# Altium PCB PCB_AVlabs AV-GMK MK I_2_2024-01-18 (1).pcbdoc (part 4 of 5)
Units mil, origin at the board's own origin, x right, y up, seen from the top; angles counter-clockwise.
Board outline 17777.1 x 9140.8 mil, 2 copper layers (Top Layer, Bottom Layer); 156 components, 279 nets, 1257 pads, 596 vias.
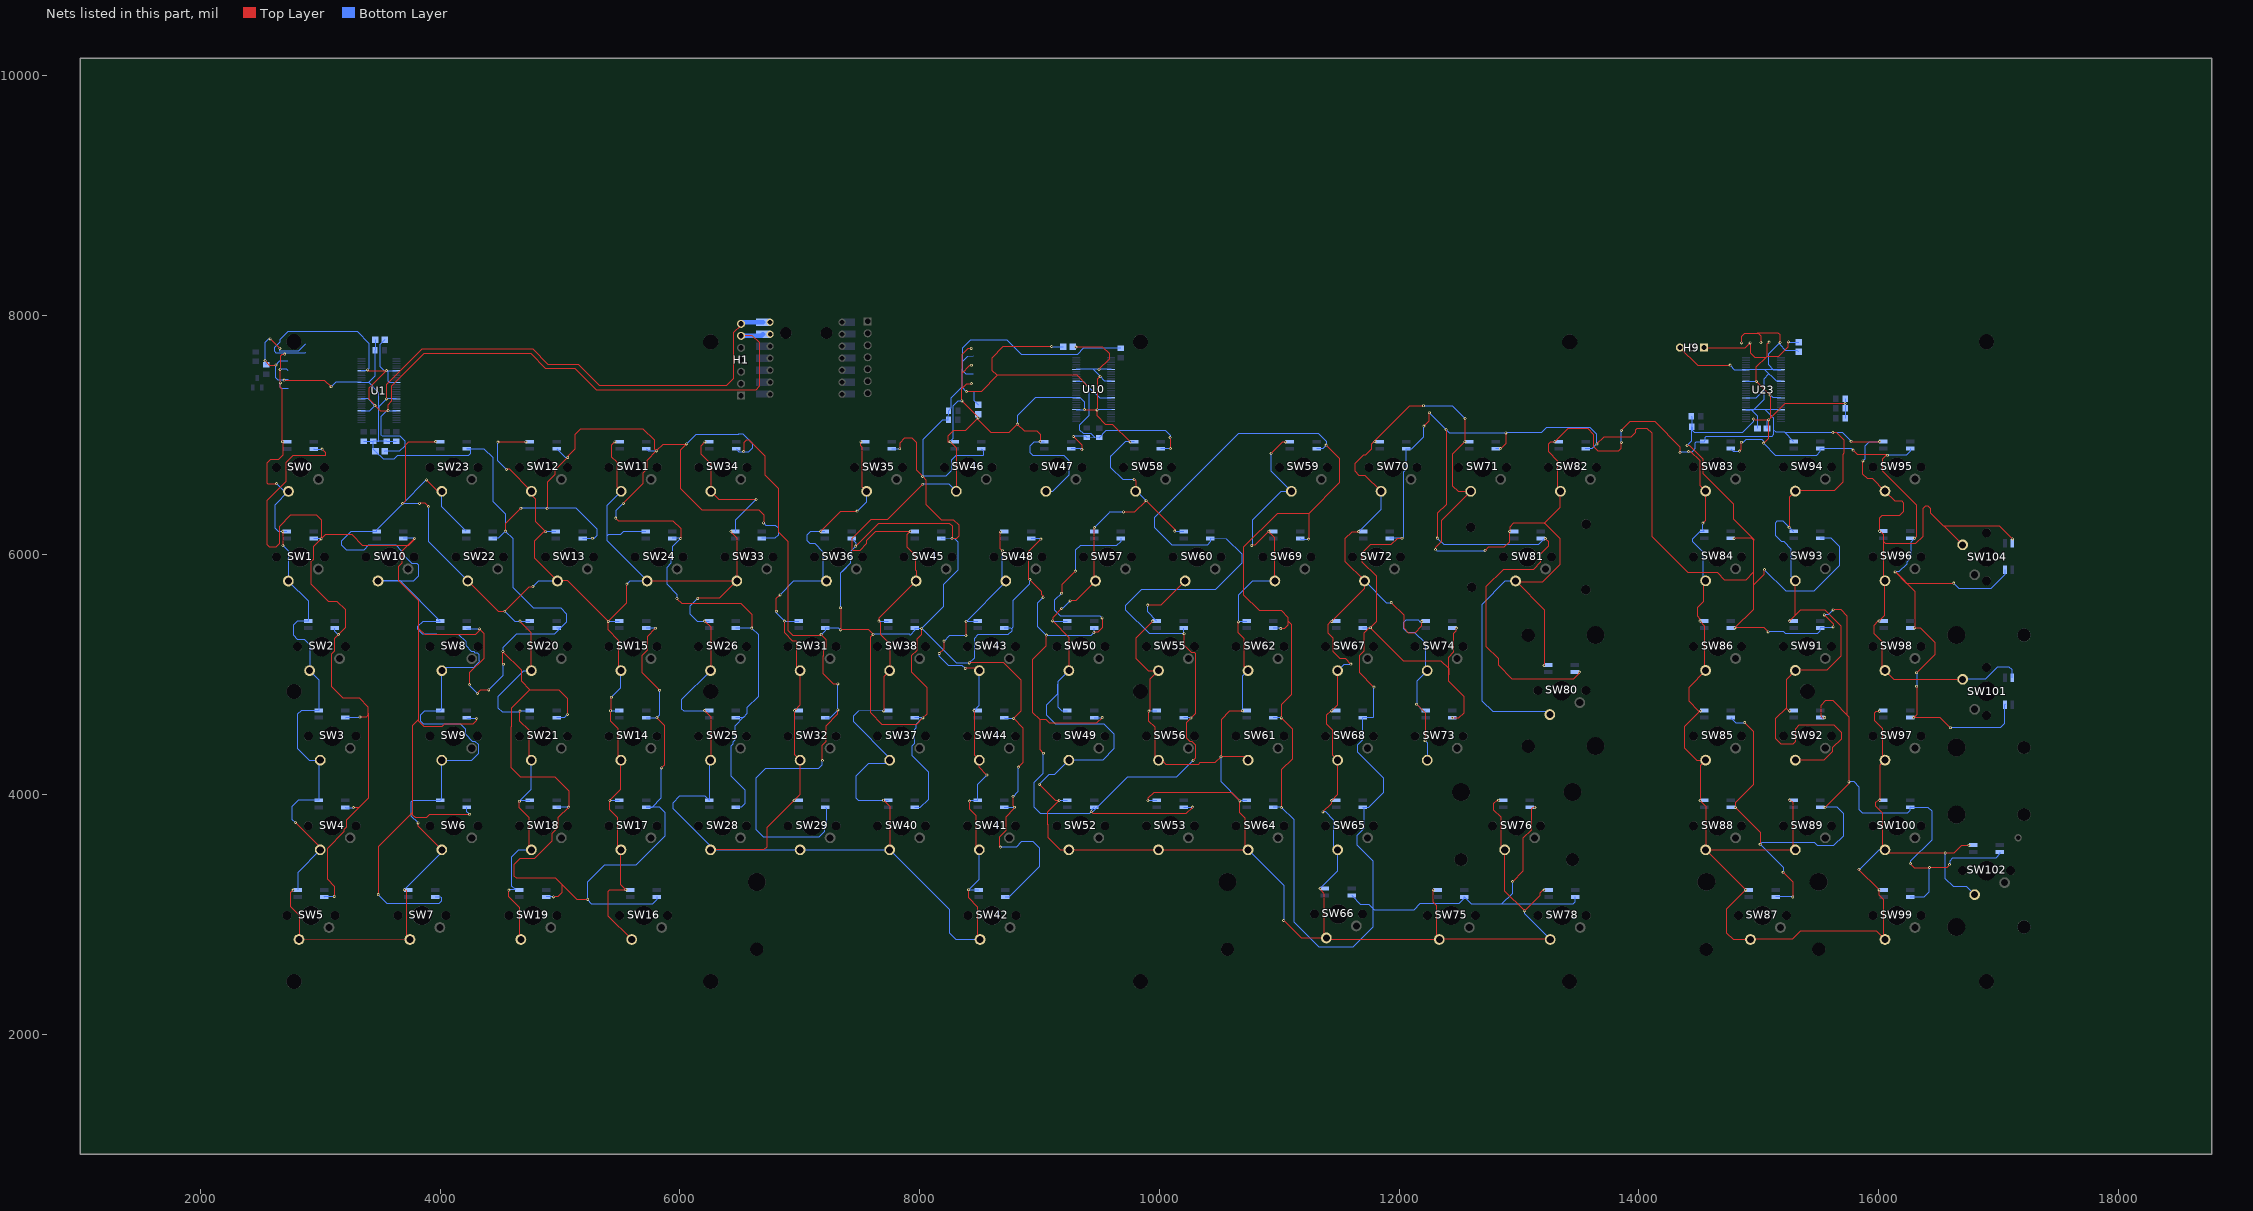
[diagram p4: the nets of this part, all layers, seen from the top]

## Via types
v1: diameter 24.41, hole 12.2, Top Layer to Bottom Layer, tented both sides, 596 vias

## Nets (pads, with @x,y where several pads share a name; then routed paths per layer and width w, separated by ;. In a path a pad name is that pad's centre, name@x,y a point inside that pad or via, vN(x,y) a via of type N, cw(c..) or ccw(c..) an arc to the next point about the centre after c; other vN are vias at no path point) (continued)
VDD_PCA: C1.1 C2.1 C3.1 C4.1 C5.1 C6.1 H1.7 H9.1 pad.14 R1.1 R2.1 R3.1 R4.1 R5.1 R6.1 R7.1 R8.1 R9.1 R10.1 R11.1 R12.1 R13.1 R14.1 R15.1 R16.2 SW0.VCC SW1.VCC SW2.VCC SW3.VCC SW4.VCC SW5.VCC SW6.VCC SW7.VCC SW8.VCC SW9.VCC SW10.VCC SW11.VCC SW12.VCC SW13.VCC SW14.VCC SW15.VCC SW16.VCC SW17.VCC SW18.VCC SW19.VCC SW20.VCC SW21.VCC SW22.VCC SW23.VCC SW24.VCC SW25.VCC SW26.VCC SW28.VCC SW29.VCC SW31.VCC SW32.VCC SW33.VCC SW34.VCC SW35.VCC SW36.VCC SW37.VCC SW38.VCC SW40.VCC SW41.VCC SW42.VCC SW43.VCC SW44.VCC SW45.VCC SW46.VCC SW47.VCC SW48.VCC SW49.VCC SW50.VCC SW52.VCC SW53.VCC SW55.VCC SW56.VCC SW57.VCC SW58.VCC SW59.VCC SW60.VCC SW61.VCC SW62.VCC SW64.VCC SW65.VCC SW66.VCC SW67.VCC SW68.VCC SW69.VCC SW70.VCC SW71.VCC SW72.VCC SW73.VCC SW74.VCC SW75.VCC SW76.VCC SW78.VCC SW80.VCC SW81.VCC SW82.VCC SW83.VCC SW84.VCC SW85.VCC SW86.VCC SW87.VCC SW88.VCC SW89.VCC SW91.VCC SW92.VCC SW93.VCC SW94.VCC SW95.VCC SW96.VCC SW97.VCC SW98.VCC SW99.VCC SW100.VCC SW101.VCC SW102.VCC SW104.VCC U1.18 U1.46 U10.18 U10.46 U23.18 U23.46 | length 131772.6
  Top Layer w10: v1(2540.7,7619.7) 2577.3,7583.1 v1(2630.9,7583.1) ; v1(2582.3,7800.6) 2661.2,7721.7 v1(2664.1,7721.7) ; v1(2699.5,7457.6) 3036.1,7457.6 v1(3092.1,7401.6) ; v1(3016.2,6880.9) 3042.6,6854.5 3042.6,6825.2 2770.4,6825.2 2711.9,6766.7 2711.9,6610.2 2554,6452.3 2554,6088.1 2574.7,6067.4 2632.6,6067.4 2661.9,6096.7 2661.9,6240.2 2754.8,6333.1 2966.2,6333.1 3007.6,6291.7 v1(3007.6,6133.1) ; v1(3117.5,3151) 3117.5,3237 3057.5,3297 3057.5,3550 3196.5,3689 3196.5,3708 3217.5,3729 3217.5,3785 3323.5,3891 ; v1@3151.5,5333 v1(3151.5,5334) ; v1(3277.5,3891) 3323.5,3891 ; v1(3331.5,4647) 3382.5,4647 3398.5,4663 3398.5,4734 3325.5,4807 3189.5,4807 3094.5,4902 3094.5,5172 3116.5,5194 3116.5,5299 v1(3151.5,5334) ; 3398.5,4683 3402.5,4679 3402.5,3970 3323.5,3891 ; v1(3484.9,3165.1) 3484.9,3563.89 3770.1,3849.09 ; v1(3555,7300) 3555,7421.1 3851.1,7717.2 4772.5,7717.2 4900.2,7589.5 5154,7589.5 5328.1,7415.4 6392.9,7415.4 6450.3,7472.8 6450.3,7856.1 6510.8,7916.6 H1.7@6510.8,7926.8 ; 3819,4622.7 3770.1,4573.8 3770.1,3833.4 3794.1,3809.4 3888.8,3809.4 3915.4,3836 v1(4247.4,3836) ; 3819,5394.6 3819,4614.8 3864.9,4568.9 4019.7,4568.9 4039.7,4588.9 4276,4588.9 4305.9,4618.8 v1(4305.9,4636.3) ; v1(4245.5,4916.4) 4245.5,5014.5 4365.9,5134.9 4365.9,5345.4 v1(4328.9,5382.4) 4328.9,5365.8 4299.7,5336.6 3871.7,5336.6 3819,5389.3 3819,5621.3 3651,5789.3 3651,5898.7 3681.6,5929.3 3681.6,6031.1 v1(3787.7,6137.2) 3787.7,6130.1 3739.1,6081.5 3353.3,6081.5 3264.1,6170.7 3045.2,6170.7 v1(3007.6,6133.1) ; v1(4311.9,4843.6) 4341,4872.7 v1(4406.6,4872.7) ; v1(4528.3,5087.2) 4523.7,5091.8 v1(4523.7,5193.4) 4676.7,5040.4 4676.7,4947.4 4749.7,4874.4 ; v1(4545.3,6197.7) 4545.3,6259.2 v1(4674.6,6388.5) ; v1(4893.6,6385.9) 4893.6,6603.3 4958.7,6668.4 4958.7,6705.7 v1(5065.4,6812.4) 5065.4,6822.4 5122,6879 5122,7001.9 5169.1,7049 5695,7049 5790.4,6953.6 5790.4,6881.4 v1(5805.2,6866.6) ; v1(4947.7,3147.4) 4981.7,3147.4 5013.7,3179.4 5013.7,3252.4 4959.7,3306.4 ; v1(5062.7,4669.4) 5062.7,4801.4 4989.7,4874.4 4749.7,4874.4 ; v1(5232.2,3125.1) 5141,3125.1 4959.7,3306.4 ; v1(5465.8,6306.6) 5487.3,6285.1 5942.7,6285.1 6006.7,6221.1 v1(6006.7,6136.1) ; v1(5528.7,6428.8) 5691.7,6591.8 5691.7,6639.9 5691.7,6680.7 5723.2,6712.2 5723.2,6784.6 v1(5805.2,6866.6) ; v1(5796.1,5387.6) 5730.8,5322.3 5730.8,5206.2 5685.5,5160.9 5685.5,5016.9 v1(5832.1,4870.3) ; v1(5808.2,4641.2) 5874.9,4574.5 5874.9,4250.4 v1(5847.1,4222.6) ; v1(5975.8,5635.4) 6014.4,5596.8 6506.5,5596.8 6600.1,5503.2 v1(6600.1,5388.2) ; v1(6531.8,6860.7) 6531.8,6933.4 6554.6,6956.2 6580.8,6956.2 6714,6823 6714,6665 6827.1,6551.9 6827.1,6186.1 6903.4,6109.8 6903.4,5367.7 6945.5,5325.6 7170.8,5325.6 v1(7178.8,5333.6) 7218.6,5293.8 7218.6,5221.5 7195,5197.9 7195,5155.8 7192.2,5153 7192.2,5012.9 7281.39,4923.71 v1(7318.3,4923.71) ; v1(6698.2,6266.7) 6698.2,6333.4 6656.9,6374.7 6183.5,6374.7 6003.5,6554.7 6003.5,6870.9 v1(6057,6924.4) 6052.6,6920 5859.5,6920 v1(5805.2,6866.6) ; v1(7190.2,4283.9) 7186.2,4287.9 7186.2,4411.9 7220.9,4446.6 7220.9,4575.9 7318.3,4673.3 v1(7318.3,4706.9) ; v1(7339.6,5558.5) 7341.5,5556.6 v1(7341.5,5373) 7576.1,5373 v1(7612.8,5336.3) 7588.8,5312.3 7588.8,5137.7 7588.8,4685.7 7686.2,4588.3 7976.8,4588.3 v1(8027.5,4639) ; v1(7467.6,6073.1) 7658.8,6264.3 8166.4,6264.3 8167.4,6263.3 8249.4,6263.3 8270.4,6242.3 v1(8270.4,6135.3) 8306.9,6135.3 8325.2,6153.6 8325.2,6250.9 8282.5,6293.6 8182.5,6293.6 8053.5,6422.6 8053.5,6625.7 v1(8025.9,6653.3) 7975.9,6703.3 7975.9,6934.9 7939.9,6970.9 7873.2,6970.9 7834.5,6932.2 v1(7834.5,6884.3) ; v1(8017.2,5385.7) 8017.2,5338 7979.7,5300.5 7979.7,5205.8 7934.9,5161 7934.9,5019 8063.9,4890 8063.9,4675.4 v1(8027.5,4639) ; v1@8028.8,4639 v1(8027.5,4639) ; v1(8390.3,7360.8) 8512.3,7360.8 8647.3,7495.8 ; v1(8414.4,5098.2) 8703.5,5098.2 8847.7,4954 8847.7,4698.8 v1(8784.3,4635.4) ; v1(8673.9,3561.9) 8670.2,3565.6 8670.2,3649 8722.1,3700.9 8722.1,3815.6 8790.6,3884.1 v1(8790.6,3894.4) 8779.2,3905.8 v1(8779.2,3982.2) ; v1@8782.3,4635.4 v1(8784.3,4635.4) ; v1(8824.3,4229.4) 8866.3,4271.4 8866.3,4553.4 v1(8784.3,4635.4) ; v1@9012.3,6135.4 v1(9012.3,6131.4) 8912.5,6031.6 8912.5,5793.5 v1(8919.9,5793.5) 9016.9,5696.5 9016.9,5671.5 9029.9,5658.5 v1(9029.9,5644.5) ; v1(9032,4344.8) 9004.6,4372.2 9004.6,4623.3 ; v1(9057.6,5330.3) 9057.6,5240.3 8944.6,5127.3 8944.6,4683.3 9004.6,4623.3 ; v1(9101.2,7737.6) 8699.1,7737.6 8606.2,7644.7 8606.2,7536.9 8647.3,7495.8 ; v1(9184.5,5679.3) 9184.5,5748.6 v1(9299.3,5863.4) ; v1(9283.6,6986.8) 9353.6,6916.8 v1(9353.6,6876.8) ; v1(9404.13,7407.27) 9315.6,7495.8 8647.3,7495.8 ; v1(9432,3856.8) 9444.2,3844.6 10225.6,3844.6 v1(10276.6,3895.6) ; v1(9453.8,5353.4) 9486.9,5353.4 9523,5389.5 v1(9523,5473.8) ; v1(9523.6,4641.5) 9475.3,4593.2 9085.5,4593.2 9055.4,4623.3 9004.6,4623.3 ; v1(10090.5,6977.3) v1(10091.2,6885.2) ; v1(10206.6,5341.7) 10206.6,5245.83 10269.43,5183 10294.6,5183 10302.6,5175 10302.6,4677.6 v1(10263.6,4638.6) ; v1@10264.6,4638.6 v1(10263.6,4638.6) ; v1(10281.6,4285.6) 10304.6,4308.6 10304.6,4410.1 10274.1,4440.6 10257.5,4440.6 10228.6,4469.5 10228.6,4603.6 v1(10263.6,4638.6) ; v1(11012.8,5383.9) 11042.4,5383.9 11070.2,5411.7 11070.2,5480.3 11014.7,5535.8 10833.2,5535.8 10701.7,5667.3 10701.7,6062 10982.9,6343.2 11244.2,6343.2 ; v1(11017.3,3890.9) 11017.3,4205.7 11108.1,4296.5 11108.1,4547.8 v1(11016.7,4639.2) 11016.7,4749.8 11099,4832.1 11099,5421.73 11070.2,5450.53 ; v1(11244.2,6131.2) 11244.2,6343.2 ; v1(11391.5,6914.5) 11501.6,6804.4 11501.6,6600.6 11244.2,6343.2 ; v1(11790.2,4897) 11670.2,5017 11670.2,5161 11708.9,5199.7 11708.9,5350.4 11750.2,5391.7 v1(11759.5,5391.7) ; v1(12023.8,6138.3) 11986.8,6138.3 11934.9,6086.4 11762.7,6086.4 11694.2,6017.9 11694.2,5938.2 11812.7,5819.7 11812.7,5444.9 v1(11759.5,5391.7) ; v1(12205.7,7073.8) 12252,7120.1 v1(12252,7184.9) ; v1(12318.1,6139) 12318.1,6346 12391.1,6419 12391.1,7043.48 v1(12392.26,7044.64) ; 12412.5,4997.55 12412.5,5051.8 12348.8,5115.5 12035.7,5115.5 v1(11759.5,5391.7) ; v1(12444.35,4640.99) 12445.16,4641.8 12498.6,4641.8 12541.3,4684.5 12541.3,4817.8 12412.5,4946.6 12412.5,5145.7 12456.5,5189.7 12456.5,5343.7 12477.5,5364.7 v1(12477.5,5387.7) ; v1@12845.7,6885.1 v1(12847,6885.1) 12889.7,6927.8 v1(12889.7,7017.1) ; v1(12947.3,3274.5) 13037.3,3364.5 13037.3,3638.6 13105.2,3706.5 13105.2,3881.4 13117.4,3893.6 v1(13131.6,3893.6) ; v1(13220.2,6135.5) 13244.2,6111.5 13244.2,6070.2 13177.5,6003.5 13177.5,5936.9 13117.5,5876.9 12867.8,5876.9 12724.2,5733.3 12724.2,5238.2 12826.8,5135.6 12826.8,5080.9 12940.1,4967.6 13456.2,4967.6 v1@13509.5,5020.9 ; v1(13649.6,6924.3) 13711,6985.7 13935.4,6985.7 13972.9,7023.2 13972.9,7043.9 13986,7057 14065.6,7057 14105.6,7017 14105.6,6156.8 14408.2,5854.2 14653,5854.2 14713.5,5793.7 14895.1,5793.7 14958.2,5856.8 14958.2,6120.2 ; v1(14402.8,6913.2) 14420.7,6913.2 14532.6,6801.3 14532.6,6680.4 14785.3,6427.7 14785.3,6301.3 14958.2,6128.4 14958.2,6120.2 ; H9.1@14541.9,7728.5 14888.14,7728.5 v1(14927.6,7767.96) 14927.6,7686.4 14967,7647 15060.5,7647 15071,7657.5 ; v1(14793.7,6137.2) 14941.2,6137.2 14958.2,6120.2 ; v1(14839.4,6864.9) 14854.8,6880.3 v1(14854.8,6938.5) ; v1(14882.5,4599.5) 14955.3,4526.7 14955.3,4082.6 14804.8,3932.1 v1(14804.8,3893.9) 15011.4,3687.3 v1(15011.4,3585.7) ; v1(14957.5,7132.7) 14964.8,7125.4 v1(15081.5,7125.4) ; 14958.2,5749.16 15047.4,5838.36 v1(15047.4,5875.8) ; 14958.2,6027.76 14958.2,5547.3 v1(14801.3,5390.4) 15044.2,5390.4 v1(15077.1,5357.5) ; v1(15039.8,6931.6) 15081.5,6973.3 v1(15081.5,7125.4) ; 15066.73,7653.23 14980.1,7566.6 v1(14980.1,7447) v1(15095.1,7332) 15095.1,7139 v1(15081.5,7125.4) ; v1(15085.5,7773.5) 15071,7759 15071,7657.5 ; v1(15202.1,3352.3) 15283.4,3271 v1(15283.4,3145.7) ; v1(15247.4,7775.6) 15247.4,7736.6 15168.3,7657.5 15071,7657.5 ; v1(15545.6,5499.4) 15620.3,5424.7 v1(15620.3,5399.4) ; v1(15549.9,4641.6) 15530.9,4641.6 15516.9,4655.6 15516.9,4742.6 15554.9,4780.6 15618.9,4780.6 15752.9,4646.6 ; v1(15552.7,3894) 15752.9,4094.2 15752.9,4646.6 ; v1(15620.3,5540.8) 15687,5540.8 15739,5488.8 15739,4660.5 15752.9,4646.6 ; v1(15719.9,7262.8) 15218.9,7262.8 v1(15081.5,7125.4) ; v1@15783.2,6873.3 v1(15787.2,6873.3) 15825.2,6835.3 16067.2,6835.3 v1(16072.2,6830.3) 16061.7,6830.3 16034.1,6802.7 16034.1,6696.7 16318.1,6412.7 16318.1,6156.3 v1(16299.7,6137.9) ; v1(16263.7,3423.6) 16295.7,3391.6 v1(16423.7,3391.6) 16565.7,3391.6 v1(16590.7,3416.6) ; v1(16316.6,4903.3) 16316.6,4667.6 v1(16291.7,4642.7) 16512.7,4642.7 v1(16597.7,4557.7) ; v1(16316.6,5016.3) 16468.5,5168.2 16468.5,5270 16348.5,5390 v1(16299.3,5390) 16305.1,5395.8 16305.1,5693.6 16140.9,5857.8 v1(16136.6,5857.8) 16230.5,5763.9 v1(16625.9,5763.9) ; v1(3007.6,6133.1) 2942.5,6068 2942.5,5960 2923.5,5941 2923.5,5757 3066.5,5614 3139.5,5614 3207.5,5546 3207.5,5390 v1(3151.5,5334) ; 4749.7,4874.4 4593.7,4718.4 4593.7,4564.4 4589.7,4560.4 4589.7,4228.4 4668.7,4149.4 4956.7,4149.4 5072.7,4033.4 v1(5072.7,3895.4) 4982.7,3805.4 4982.7,3721.4 4932.7,3671.4 4932.7,3610.4 4785.7,3463.4 4664.7,3463.4 4615.7,3414.4 4615.7,3324.4 4633.7,3306.4 4959.7,3306.4
  Bottom Layer w10: R16.2@2552,7585.67 2552,7608.4 v1(2540.7,7619.7) 2540.7,7771.1 2570.2,7800.6 v1(2582.3,7800.6) ; v1(2664.1,7721.7) 2664.1,7697.7 2817.6,7697.7 2874.8,7754.9 ; 2731.57,7616.59 2664.39,7616.59 v1(2630.9,7583.1) 2630.9,7477.6 2650.9,7457.6 v1(2699.5,7457.6) 2700.9,7459 2733.47,7459 ; SW1.VCC@2944.85,6135.59 3005.11,6135.59 v1(3007.6,6133.1) ; SW0.VCC@2946.05,6883.49 2948.64,6880.9 v1(3016.2,6880.9) ; SW5.VCC@3033.85,3145.79 3039.06,3151 v1(3117.5,3151) ; v1(3092.1,7401.6) 3128.1,7437.6 U1.18@3344.73,7437.6 3403.4,7437.6 ; SW2.VCC@3122.38,5388.27 3122.35,5363.15 v1(3151.5,5334) ; SW4.VCC@3210.85,3893.49 3213.34,3891 v1(3277.5,3891) ; SW3.VCC@3210.98,4641.47 3216.46,4647 v1(3331.5,4647) ; R1.1@3365.2,6948.23 R2.1@3443.5,6948.13 R5.1@3556.4,6948.03 R4.1@3634.7,6947.83 ; R2.1@3443.5,6948.13 3443.5,6881.03 C2.1@3461.23,6863.3 ; C1.1@3459.33,7794.8 3457.83,7793.3 R3.1@3457.83,7708.1 3457.83,7492.03 3403.4,7437.6 ; C2.1@3461.23,6863.3 3525.3,6799.2 3618,6799.2 3649,6830.2 4238,6830.2 4256.2,6848.4 4256.2,6884.2 SW23.VCC@4224.7,6884.2 ; 3481.1,6948.1 3489.1,6948.1 3489.1,7351.9 3403.4,7437.6 ; v1(3484.9,3165.1) 3555.6,3094.4 3994.2,3094.4 4014.7,3114.9 4014.7,3138.8 4007.9,3145.6 SW7.VCC@3958.98,3145.57 ; 3489.8,7208.4 3489.8,7235.2 3554.5,7299.8 U1.46@3636.07,7299.8 ; SW10.VCC@3693.18,6136.27 v1(3787.7,6137.2) ; SW9.VCC@4224.58,4641.06 4229.34,4636.3 v1(4305.9,4636.3) ; SW6.VCC@4224.78,3893.76 4224.75,3858.65 v1(4247.4,3836) ; SW8.VCC@4224.78,5388.06 4230.44,5382.4 v1(4328.9,5382.4) ; SW23.VCC@4224.78,6884.16 4225.96,6885.4 4366.7,6885.4 4438.7,6813.4 4438.7,6448.4 4545.7,6341.4 v1@4545.7,6197.4 ; v1(4245.5,4916.4) 4245.5,4910 v1(4311.9,4843.6) 4312.2,4843.3 v1@4312.2,4840.5 ; v1(4406.6,4872.7) 4528.3,4994.4 v1(4528.3,5087.2) ; SW22.VCC@4441.38,6136.36 4484.69,6136.39 v1@4545.7,6197.4 ; v1(4523.7,5193.4) 4523.7,5223.4 4636.7,5336.4 4951.7,5336.4 5053.7,5438.4 ; v1(4674.6,6388.5) 5134.2,6388.5 5311.5,6211.2 5311.5,6161.8 5287.5,6137.8 v1(5270.72,6137.8) 5190.76,6137.8 SW13.VCC@5189.25,6136.29 ; SW19.VCC@4884.25,3145.79 4946.09,3145.79 v1(4947.7,3147.4) ; SW18.VCC@4971.98,3893.76 5071.09,3893.79 v1(5072.7,3895.4) ; SW21.VCC@4971.98,4640.97 5034.29,4640.99 v1(5062.7,4669.4) ; SW20.VCC@4971.98,5388.27 5003.6,5388.3 5053.7,5438.4 ; SW12.VCC@4972.45,6884.29 5044.34,6812.4 v1(5065.4,6812.4) ; v1(5465.8,6306.6) 5465.8,6365.9 v1(5528.7,6428.8) ; SW17.VCC@5719.18,3893.76 5768.29,3893.79 5847.1,3972.6 v1(5847.1,4222.6) ; SW17.VCC@5719.18,3893.76 5832.5,3893.8 5876.8,3849.5 5876.8,3654.5 5637.5,3415.2 5372.5,3415.2 5231.8,3274.5 5231.8,3120.9 5266.8,3085.9 5550.4,3085.9 5551.8,3084.5 5768.1,3084.5 5809,3123.8 SW16.VCC@5809,3145.9 ; SW14.VCC@5719.18,4640.97 v1(5808.2,4641.2) 5832.1,4665.1 v1(5832.1,4870.3) ; SW15.VCC@5719.18,5388.27 v1(5796.1,5387.6) ; SW11.VCC@5720.78,6884.27 5738.44,6866.6 v1(5805.2,6866.6) ; SW24.VCC@5937.38,6136.36 v1(6006.7,6136.1) 5937.2,6066.6 5937.2,5993.2 5924.4,5980.4 5924.4,5928.9 5889.4,5893.9 5889.4,5756.8 5975.8,5670.4 v1(5975.8,5635.4) ; v1(6057,6924.4) 6135,7002.4 6487,7002.4 6488.5,7003.9 6530.5,7003.9 6608,6926.4 6608,6894.4 6573.5,6859.9 6493.14,6859.9 SW34.VCC@6468.78,6884.27 ; SW28.VCC@6466.38,3893.76 6511.79,3893.79 6539.7,3921.7 6539.7,4042.2 6426.8,4155.1 6426.8,4402.9 6442.8,4418.9 6442.8,4438.2 6457.8,4453.2 6457.8,4571.1 6529.92,4643.22 ; SW25.VCC@6466.45,4640.99 6527.69,4640.99 6560.4,4673.7 6560.4,4723.7 6652.5,4815.8 6652.5,5335.8 v1(6600.1,5388.2) SW26.VCC@6466.48,5388.27 ; SW33.VCC@6685.38,6136.27 6793.19,6136.29 6820.9,6164 6820.9,6224 6796.9,6248 6716.9,6248 v1(6698.2,6266.7) ; v1(7178.8,5333.6) 7213.65,5368.45 7213.65,5388.19 7326.31,5388.19 v1(7341.5,5373) ; v1(7190.2,4283.9) 7190.2,4247.8 7160.9,4218.5 6715.5,4218.5 6638.2,4141.2 6638.2,3707.9 6700.9,3645.2 7158.2,3645.2 7204.9,3691.9 7204.9,3742.6 7219.5,3757.2 7219.5,3887.94 SW29.VCC@7213.65,3893.79 ; SW32.VCC@7213.58,4640.97 7256.69,4640.99 7318.3,4702.6 v1(7318.3,4706.9) v1(7318.3,4923.71) ; v1(7339.6,5558.5) 7339.6,5845.1 7423.6,5929.1 ; 7353,5858.5 7423.6,5929.1 ; v1(7612.8,5336.3) 7916.9,5336.3 7922.2,5331 7960.85,5369.65 7960.85,5388.29 7963.44,5385.7 v1(8017.2,5385.7) ; SW35.VCC@7768.38,6884.06 v1(7834.5,6884.3) ; SW40.VCC@7960.78,3893.76 8007.09,3893.79 8074.6,3961.3 8074.6,4187.1 7937.6,4324.1 7937.6,4405.7 7959.8,4427.9 7959.8,4546.4 7970.9,4557.5 7970.9,4587.1 8022.8,4639 v1(8027.5,4639) 8025.41,4641.09 SW37.VCC@7960.78,4641.06 ; SW45.VCC@8181.28,6136.27 v1(8270.4,6135.3) 8292.7,6135.3 8321.4,6106.6 8321.4,5875.2 8201,5754.8 8201,5569.5 v1(8017.2,5385.7) ; R7.1@8240.73,7127.8 R6.1@8241.53,7202.5 ; R7.1@8240.73,7127.8 8192.5,7127.8 8030.4,6965.7 8030.4,6657.8 v1(8025.9,6653.3) 8216.9,6653.3 8265.9,6702.3 8265.9,6790.3 8302.9,6827.3 8526.9,6827.3 8531.9,6832.3 8531.9,6868.54 SW46.VCC@8516.08,6884.36 ; R6.1@8241.53,7202.5 8264.1,7225.07 8264.1,7308.2 8355.6,7399.7 8355.6,7408.89 ; 8355.6,7551.19 8355.6,7396.2 8391.3,7360.5 8448.36,7360.5 8449.86,7359 8449.86,7289.31 C4.1@8488.4,7250.77 ; 8355.6,7585.86 8355.6,7724.7 8422,7791.1 8729.9,7791.1 8850.9,7670.1 9314.1,7670.1 9366.47,7722.47 R10.1@9679.1,7722.47 ; 8446.46,7654.4 8398.5,7654 8355.6,7610.4 8355.6,7541.2 8385.8,7511 8447.06,7511 ; v1(8673.9,3561.9) 8805.4,3561.9 8849.9,3606.4 8949.9,3606.4 9003.6,3552.7 9003.6,3402.7 8746.7,3145.8 SW42.VCC@8714.68,3145.76 ; SW41.VCC@8708,3893.8 v1(8790.6,3894.4) ; SW44.VCC@8708.18,4640.97 8713.74,4635.4 v1(8784.3,4635.4) ; SW43.VCC@8708.18,5388.27 8762.3,5388.3 8770.9,5379.7 8770.9,5367 8740.9,5337 8489.9,5337 8458.9,5306 8458.9,5142.7 v1(8414.4,5098.2) 8304.7,5098.2 v1(8017.2,5385.7) ; 8767.3,5383.3 8782.9,5398.5 8782.9,5621 8919.9,5758 v1(8919.9,5793.5) ; v1(8779.2,3982.2) 8824.3,4027.3 v1(8824.3,4229.4) ; SW48.VCC@8929.48,6136.27 9007.3,6136.3 v1(9012.3,6131.4) ; v1(9029.9,5644.5) 8982.9,5597.5 8982.9,5403.5 9057.9,5328.5 9431.5,5328.5 9455.3,5352.4 SW50.VCC@9455.3,5388.3 ; v1(9032,4344.8) 9032,4179.4 8956,4103.4 8956,3892.8 9009.4,3839.4 9414.6,3839.4 v1(9432,3856.8) ; v1(9101.2,7737.6) 9104.9,7733.9 C3.1@9198.53,7733.9 ; v1(9184.5,5679.3) 9124.5,5619.3 9124.5,5540.7 9172.5,5492.7 9504.1,5492.7 v1(9523,5473.8) ; SW47.VCC@9264.05,6884.29 9346.11,6884.29 v1(9353.6,6876.8) ; v1(9283.6,6986.8) 9387.93,6986.8 R8.1@9396.2,6978.53 ; v1(9299.3,5863.4) 9299.3,6036.3 9338.6,6075.6 9641.5,6075.6 9676.5,6110.6 SW57.VCC@9677.4,6136.3 ; U10.18@9306.73,7447.7 9363.7,7447.7 v1(9404.13,7407.27) 9501.5,7309.9 U10.46@9598.07,7309.9 ; R8.1@9396.2,6978.53 R9.1@9498.1,6977.93 ; v1(9404.13,7407.27) 9410.3,7401.1 9410.3,7159.4 9333.2,7082.3 9333.2,7043.3 9363.2,7013.3 9426.2,7013.3 9455.2,6984.3 9455.2,6978.2 ; SW52.VCC@9455.3,3893.8 9432,3870.4 v1(9432,3856.8) ; SW49.VCC@9455.3,4641 v1(9523.6,4641.5) ; R9.1@9498.1,6977.93 9558.17,7038 10050.5,7038 10090.5,6998 v1(10090.5,6977.3) ; SW58.VCC@10012,6884.3 v1(10091.2,6885.2) ; SW53.VCC@10202.65,3893.79 10204.46,3895.6 v1(10276.6,3895.6) ; SW56.VCC@10202.65,4641.09 10261.11,4641.09 v1(10263.6,4638.6) ; SW55.VCC@10202.65,5388.29 10202.65,5345.65 v1(10206.6,5341.7) 10204.3,5344 9913.6,5344 9717.3,5540.3 9717.3,5575.5 9850.6,5708.8 10465.1,5708.8 10687,5930.7 10687,6008.7 10560,6135.7 SW60.VCC@10425.48,6136.27 10426.2,6107.8 10399.5,6081.1 10108.8,6081.1 9962.2,6227.7 9962.2,6314.5 10660.8,7013.1 11323.5,7013.1 11391.5,6945.1 v1(11391.5,6914.5) 11361.3,6884.3 SW59.VCC@11311.28,6884.27 ; v1(10281.6,4285.6) 10145.6,4149.6 9736.6,4149.6 9443.8,3856.8 v1(9432,3856.8) ; SW64.VCC@10949.85,3893.79 11014.41,3893.79 v1(11017.3,3890.9) 11021.4,3890.9 11124.3,3788 11124.3,2933.8 11333.3,2724.8 11612.3,2724.8 11780.7,2893.2 11780.7,3051.1 11746.5,3085.3 11676.24,3085.3 SW66.VCC@11602.85,3158.69 ; SW61.VCC@10949.85,4641.09 11014.81,4641.09 v1(11016.7,4639.2) ; SW62.VCC@10949.85,5388.29 11008.41,5388.29 v1(11012.8,5383.9) ; SW69.VCC@11173.45,6136.29 11178.54,6131.2 v1(11244.2,6131.2) ; SW67.VCC@11697.05,5388.29 11756.09,5388.29 v1(11759.5,5391.7) ; 11766.98,3064.82 11791,3040.8 12127,3040.8 12178,3091.8 12500,3091.8 12545.05,3136.85 12545.05,3145.79 12603.14,3087.7 13452.6,3087.7 13470.25,3105.35 SW78.VCC@13470.25,3145.79 ; 11780.7,3037.22 11780.7,3447.6 11647.1,3581.2 11647.1,3657.2 11704.5,3714.6 11704.5,3886.34 11697.05,3893.79 11745.99,3893.79 11871.1,4018.9 11871.1,4136.3 11654.9,4352.5 11654.9,4416.2 11697.05,4458.35 11697.05,4640.99 11699.76,4643.7 11783.5,4643.7 11790.2,4650.4 v1(11790.2,4897) ; SW72.VCC@11921.45,6136.29 12021.79,6136.29 v1(12023.8,6138.3) 12037.6,6152.1 12037.6,6691.2 12059.25,6712.85 SW70.VCC@12059.25,6884.29 ; SW70.VCC@12059.28,6884.27 12107,6884.3 12205.7,6983 v1(12205.7,7073.8) ; v1(12252,7184.9) v1(12392.26,7044.64) 12419.8,7017.1 v1(12889.7,7017.1) 13185,7017.1 13227.4,7059.5 13594,7059.5 13649.6,7003.9 v1(13649.6,6924.3) 13612.6,6887.3 13558.46,6887.3 SW82.VCC@13555.45,6884.29 ; v1(12318.1,6139) 12370.1,6087 13163.1,6087 13211.6,6135.5 v1(13220.2,6135.5) ; SW71.VCC@12807.2,6884.4 v1(12847,6885.1) ; 12857.82,3087.7 12947.3,3177.18 v1(12947.3,3274.5) ; v1(14402.8,6913.2) 14440.03,6950.43 R14.1@14440.03,7069 14440.03,7150.4 R15.1@14435.83,7154.6 ; R14.1@14440.03,7069 14446,7063 14446,7037.7 14459.6,7024.1 14867.5,7024.1 14957.5,7114.1 v1(14957.5,7132.7) ; SW85.VCC@14766.45,4641.79 14808.74,4599.5 v1(14882.5,4599.5) ; SW83.VCC@14766.45,6885.89 14787.44,6864.9 v1(14839.4,6864.9) ; 14868.8,6939.1 14893.3,6963.6 15023.3,6963.6 15039.8,6947.1 v1(15039.8,6931.6) 15139,6832.4 15483.7,6832.4 15514.55,6863.25 SW94.VCC@15514.58,6885.86 15774.61,6885.89 v1(15787.2,6873.3) ; U23.18@14893.03,7446.4 v1(14980.1,7447) ; v1(15047.4,5875.8) 15224.7,5698.5 15460.7,5698.5 15675.4,5913.2 15675.4,6065.2 15602.71,6137.89 SW93.VCC@15514.58,6137.86 ; C6.1@15068.37,7053.8 15068.37,7112.27 v1(15081.5,7125.4) ; v1(15077.1,5357.5) 15207.1,5357.5 15224.2,5340.4 15486.3,5340.4 15506.3,5360.4 15506.3,5381.64 15514.45,5389.79 15610.69,5389.79 v1(15620.3,5399.4) ; v1(15095.1,7332) 15118.5,7308.6 U23.46@15184.37,7308.6 ; SW87.VCC@15140.48,3145.76 v1(15283.4,3145.7) ; v1(15202.1,3352.3) 15202.1,3395 v1(15011.4,3585.7) 15026.9,3601.2 15464,3601.2 15488.1,3577.1 15625.1,3577.1 15706.6,3658.6 15706.6,3840.1 15652.7,3894 v1(15552.7,3894) ; v1@15248.5,7773.56 15249.59,7772.47 C5.1@15331.7,7772.47 ; SW92.VCC@15514.48,4641.77 v1(15549.9,4641.6) ; v1(15545.6,5499.4) 15578.9,5499.4 v1(15620.3,5540.8) ; R12.1@15720.17,7137.6 R11.1@15720.97,7301.8 ; v1(15752.1,4105.7) 15796.8,4105.7 15839.4,4063.1 15839.4,3873.7 15868.7,3844.4 16238.1,3844.4 16259.4,3865.7 16259.4,3890.74 16262.45,3893.79 16264.26,3895.6 16409.7,3895.6 16440.7,3864.6 16440.7,3620.6 16263.7,3443.6 v1(16263.7,3423.6) ; v1(16072.2,6830.3) 16229.2,6830.3 16262.45,6863.55 SW95.VCC@16262.45,6885.89 ; v1(16136.6,5857.8) 16168.7,5857.8 16233.7,5922.8 16233.7,5938.5 16253.7,5958.5 16253.7,5985.6 16266.6,5998.5 16266.6,6104.8 v1(16299.7,6137.9) ; SW99.VCC@16262.6,3145.8 16381.7,3146.6 16423.7,3188.6 v1(16423.7,3391.6) ; v1(16316.6,4903.3) v1(16316.6,5016.3) ; v1(16590.7,3416.6) 16590.7,3445.5 16614.3,3469.1 16975,3469.1 17010.55,3504.65 SW102.VCC@17010.58,3519.76 ; v1(16597.7,4557.7) 17015.7,4557.7 17048.7,4590.7 17048.7,4745.06 SW101.VCC@17054.99,4751.35 ; v1(16625.9,5763.9) 16668.9,5720.9 16937.9,5720.9 17054.99,5837.99 SW104.VCC@17054.99,5873.35 ; v1@4545.7,6197.4 4605.7,6137.4 4605.7,5727.4 4776.7,5556.4 5006.7,5556.4 5053.7,5509.4 5053.7,5438.4 ; 7423.6,5929.1 7423.6,5994.5 ; 7423.6,5929.1 7423.6,5994.5 ; 7423.6,5994.5 7424.9,5995.8 ; 7423.6,5994.5 7424.9,5995.8 ; 7424.9,5995.8 7424.9,6030.4 ; 7424.9,5995.8 7424.9,6030.4 ; 7424.9,6030.4 v1(7467.6,6073.1) ; 7424.9,6030.4 v1(7467.6,6073.1) ; v1(7467.6,6073.1) 7467.6,6101.64 ; v1(7467.6,6073.1) 7467.6,6101.64 ; 7467.6,6101.64 7433.05,6136.19 7467.6,6101.64
  Bottom Layer w39.37: H1.7@6510.8,7926.8 6523.55,7939.56 pad.14@6693.44,7939.56
  other v1: 13502.8,5022.2
VSS_PCA: C1.2 C2.2 C3.2 C4.2 C5.2 C6.2 H1.6 H9.3 pad.13 SW0.GND SW0.SW2 SW1.GND SW1.SW2 SW2.GND SW2.SW2 SW3.GND SW3.SW2 SW4.GND SW4.SW2 SW5.GND SW5.SW2 SW6.GND SW6.SW2 SW7.GND SW7.SW2 SW8.GND SW8.SW2 SW9.GND SW9.SW2 SW10.GND SW10.SW2 SW11.GND SW11.SW2 SW12.GND SW12.SW2 SW13.GND SW13.SW2 SW14.GND SW14.SW2 SW15.GND SW15.SW2 SW16.GND SW16.SW2 SW17.GND SW17.SW2 SW18.GND SW18.SW2 SW19.GND SW19.SW2 SW20.GND SW20.SW2 SW21.GND SW21.SW2 SW22.GND SW22.SW2 SW23.GND SW23.SW2 SW24.GND SW24.SW2 SW25.GND SW25.SW2 SW26.GND SW26.SW2 SW28.GND SW28.SW2 SW29.GND SW29.SW2 SW31.GND SW31.SW2 SW32.GND SW32.SW2 SW33.GND SW33.SW2 SW34.GND SW34.SW2 SW35.GND SW35.SW2 SW36.GND SW36.SW2 SW37.GND SW37.SW2 SW38.GND SW38.SW2 SW40.GND SW40.SW2 SW41.GND SW41.SW2 SW42.GND SW42.SW2 SW43.GND SW43.SW2 SW44.GND SW44.SW2 SW45.GND SW45.SW2 SW46.GND SW46.SW2 SW47.GND SW47.SW2 SW48.GND SW48.SW2 SW49.GND SW49.SW2 SW50.GND SW50.SW2 SW52.GND SW52.SW2 SW53.GND SW53.SW2 SW55.GND SW55.SW2 SW56.GND SW56.SW2 SW57.GND SW57.SW2 SW58.GND SW58.SW2 SW59.GND SW59.SW2 SW60.GND SW60.SW2 SW61.GND SW61.SW2 SW62.GND SW62.SW2 SW64.GND SW64.SW2 SW65.GND SW65.SW2 SW66.GND SW66.SW2 SW67.GND SW67.SW2 SW68.GND SW68.SW2 SW69.GND SW69.SW2 SW70.GND SW70.SW2 SW71.GND SW71.SW2 SW72.GND SW72.SW2 SW73.GND SW73.SW2 SW74.GND SW74.SW2 SW75.GND SW75.SW2 SW76.GND SW76.SW2 SW78.GND SW78.SW2 SW80.GND SW80.SW2 SW81.GND SW81.SW2 SW82.GND SW82.SW2 SW83.GND SW83.SW2 SW84.GND SW84.SW2 SW85.GND SW85.SW2 SW86.GND SW86.SW2 SW87.GND SW87.SW2 SW88.GND SW88.SW2 SW89.GND SW89.SW2 SW91.GND SW91.SW2 SW92.GND SW92.SW2 SW93.GND SW93.SW2 SW94.GND SW94.SW2 SW95.GND SW95.SW2 SW96.GND SW96.SW2 SW97.GND SW97.SW2 SW98.GND SW98.SW2 SW99.GND SW99.SW2 SW100.GND SW100.SW2 SW101.GND SW101.SW2 SW102.GND SW102.SW2 SW104.GND SW104.SW2 U1.6 U1.11 U1.23 U1.34 U1.39 U1.51 U10.6 U10.11 U10.23 U10.34 U10.39 U10.51 U23.6 U23.11 U23.23 U23.34 U23.39 U23.51 | length 134590.8
  Top Layer w10: v1(2637.4,6593.2) 2564.4,6593.2 2555.4,6602.2 2555.4,6765.2 2583.4,6793.2 2651.4,6793.2 2687.4,6829.2 v1(2687.4,6943.2) 2683.6,6947 2683.6,7381.8 2668.7,7396.7 v1(2668.7,7434.3) 2669.4,7660.9 2683.3,7674.8 2703.2,7674.8 v1(2704.6,7673.4) ; v1(2686.78,6194.65) 2689.3,6192.13 v1(2689.3,6078.7) ; v1(2774.8,3203.1) 2751.8,3180.1 2751.8,3067.1 2823.78,2995.12 SW5.SW2@2823.79,2791.32 SW7.SW2@3748.89,2791.12 3722.8,2817.2 3722.8,3193.1 3709.8,3206.1 v1(3702.8,3206.1) ; v1(2792.8,3768.1) 3000.78,3560.12 SW4.SW2@3000.79,3539.02 ; v1(3396.58,7542.98) 3402.56,7537 v1(3552.6,7537) 3405,7389.4 3405,7300 3502.9,7202.1 v1(3566.4,7202.1) 3566.4,7252.9 3596.7,7283.2 3596.7,7408.2 3868.9,7680.4 4755.9,7680.4 4878.2,7558.1 5122.6,7558.1 5302.2,7378.5 6636.4,7378.5 6666.4,7408.5 6666.4,7766.7 6606.29,7826.81 H1.6@6510.8,7826.8 ; v1(3688.07,6427.47) 3713.4,6452.8 3713.4,6918.1 3738.9,6943.6 v1(3963.6,6943.6) ; v1(3817.8,3763.1) 3817.8,3736.2 SW6.SW2@4014.69,3539.32 ; v1(3828.7,6429) 3876.9,6429 v1(3904.7,6401.2) ; v1(3885.9,6625.3) 3981.48,6529.72 SW23.SW2@4014.69,6529.72 ; SW22.SW2@4231.29,5781.92 4484.2,5529 v1(4539.9,5529) 4745.7,5734.8 v1(4774.5,5734.8) ; v1(4483.2,6940.7) 4484.2,6941.7 v1(4716.2,6941.7) ; v1(4554.2,6711.7) 4580.5,6711.7 SW12.SW2@4762.39,6529.82 4762.38,6500.52 4799.2,6463.7 4799.2,6274.9 v1(4881.9,6192.2) 4863.3,6192.2 4789.9,6118.8 4789.9,5971.1 SW13.SW2@4979.19,5781.82 5066.18,5781.82 v1(5403,5445) ; v1(4574.4,3203.7) 4574.4,3148.1 4665.1,3057.4 4665.1,2800.4 SW19.SW2@4674.19,2791.32 ; v1(4661.4,3944.4) 4661.4,3890.8 4744.8,3807.4 4744.8,3556.4 SW18.SW2@4761.89,3539.32 ; v1(4667,4696.3) 4667,4611.1 4742.9,4535.2 4742.9,4305.5 SW21.SW2@4761.89,4286.52 ; v1(4667,5446.3) 4761.88,5351.42 SW20.SW2@4761.89,5033.82 ; v1(5430,4812) 5430,4707 v1(5422,4699) 5422,4613 5488,4547 5488,4307.6 SW14.SW2@5509.09,4286.52 5509.08,4045.08 v1(5416,3952) 5416,3874 5484,3806 5484,3564.4 SW17.SW2@5509.09,3539.32 5509.08,3246.92 v1(5550.1,3205.9) 5414.1,3205.9 5403.4,3195.2 5403.4,2987 SW16.SW2@5598.99,2791.42 ; v1@5461.7,6942 v1(5457.7,6942) 5433.7,6918 5433.7,6815.3 5479,6770 5479,6561.5 SW11.SW2@5510.69,6529.82 ; SW15.SW2@5509.09,5033.82 5492,5050.9 5492,5285 5403,5374 v1(5403,5445) ; v1(5558.3,5755.1) 5558.3,5600.3 v1(5403,5445) ; SW24.SW2@5727.29,5781.92 SW33.SW2@6475.29,5781.82 ; v1(6149.8,5636.4) 6329.86,5636.4 SW33.SW2@6475.29,5781.82 ; v1(6206.86,4700.05) 6256.38,4650.53 SW25.SW2@6256.39,4286.52 ; v1(6206.86,5447.35) 6256.38,5397.83 SW26.SW2@6256.39,5033.82 ; v1(6209.4,6942.1) 6174.4,6907.1 6174.4,6842.1 6258.68,6757.82 SW34.SW2@6258.69,6529.82 6326.4,6462.1 v1(6636.4,6462.1) ; SW28.SW2@6256.29,3539.32 6702.02,3539.32 6724.6,3561.9 6724.6,3722.4 v1(6953.6,3951.4) 7003.48,4001.28 SW32.SW2@7003.49,4286.52 6956.7,4333.3 v1(6956.7,4700.9) 7003.58,4747.78 SW31.SW2@7003.59,5033.72 6975.4,5061.9 6975.4,5280 6943.9,5280 6879.1,5344.8 6874.1,5349.8 v1(6874.1,5446.5) ; v1(6425.4,6194.1) 6475.28,6144.22 SW33.SW2@6475.29,5781.82 ; v1(6805.3,5529.3) 6806.1,5530.1 6806.1,5635.9 v1(6836.1,5665.9) v1@6838.1,5665.9 ; v1(7175.12,6195.25) 7343.77,6363.9 v1(7479.1,6363.9) ; v1(7511.1,6941.9) 7511.1,6908.9 7523.1,6896.9 7523.1,6564.8 SW35.SW2@7558.29,6529.62 ; v1(7699.08,3952.9) 7750.68,3901.3 SW40.SW2@7750.69,3539.32 ; v1(7699.7,4697.4) 7699.7,4982.74 SW38.SW2@7750.79,5033.82 7750.78,5258.42 7670.9,5338.3 7670.9,5435.6 v1(7660.2,5446.3) 7660.2,5470.84 SW45.SW2@7971.19,5781.82 7971.18,5865.32 7962.2,5874.3 7962.2,5996.3 7892.2,6066.3 7892.2,6166.7 v1(7920.5,6195) 7635.6,6195 7560.1,6119.5 7560.1,6094.5 7505.1,6039.5 7441.1,6039.5 7433.1,6047.5 7433.1,6133.2 7593.1,6293.2 7731.1,6293.2 v1(8026.4,6588.5) ; v1(8203.8,5280.8) 8203.8,5216.8 ; SW46.SW2@8305.99,6529.92 8305.98,6891.02 v1(8254.3,6942.7) 8235,6942.7 8232.9,6944.8 8232.9,6987 8279.3,7033.4 8379.3,7033.4 v1(8488.6,7142.7) ; 8352.8,7385.9 8354.3,7387.4 8354.3,7515.9 ; v1(8380.8,5051.8) 8480.1,5051.8 SW43.SW2@8498.09,5033.82 ; v1(8385.8,5327.8) 8388.8,5330.8 v1(8388.8,5442.8) ; v1(8408.5,3206.2) 8408.5,3138.2 8484.5,3062.2 8484.5,2811.4 SW42.SW2@8504.59,2791.32 ; v1(8416.9,3945.8) 8416.9,3879.1 8474.2,3821.8 8474.2,3563.1 SW41.SW2@8497.99,3539.32 ; v1@8430,7430.2 v1(8432.1,7428.1) 8395,7428.1 8353.4,7386.5 v1(8353.4,7284.3) 8488.6,7149.1 v1(8488.6,7142.7) ; v1(8430.7,7721.6) 8405,7721.6 8355,7671.6 8355,7516.6 8354.3,7515.9 ; v1(8432.1,7580.9) 8419.3,7580.9 8354.3,7515.9 ; v1@8454.2,4701.8 v1(8454.2,4700.5) 8458.2,4696.5 8458.2,4326.4 SW44.SW2@8498.09,4286.52 8498.08,4226.02 v1(8560.9,4163.2) ; v1(8673.8,6190.8) 8673.8,6050.8 v1(8690.8,6033.8) ; v1(8998.5,4084.6) 9131.8,3951.3 v1(9163.8,3951.3) 9066.5,3854 9066.5,3752.6 9067.8,3751.3 9067.8,3646 9174.48,3539.32 SW52.SW2@9245.29,3539.32 SW53.SW2@9992.59,3539.32 SW64.SW2@10739.79,3539.32 10716.8,3562.3 10716.8,3804.1 10671.8,3849.1 v1(10671.8,3947.9) 10603,4016.7 9951.2,4016.7 9903.9,3969.4 v1(9903.9,3952) ; v1(9005.1,6944.5) 9005.1,7005.5 8977.1,7033.5 8873.1,7033.5 v1(8816.1,7090.5) 8742.6,7017 8597.8,7017 8488.6,7126.2 v1(8488.6,7142.7) ; v1(9185.1,5552.9) 9109.1,5476.9 v1(9109.1,5448.9) 9245.28,5312.72 SW50.SW2@9245.29,5033.82 ; v1(9256.1,5615.9) 9301.46,5615.9 SW57.SW2@9467.39,5781.82 9458,5791.2 v1(9458,6226.9) ; v1(9304.4,7732.5) 9527.4,7732.5 9584.4,7675.5 9584.4,7634.12 v1(9496.4,7546.12) ; v1(9375,7210.9) 9377.2,7208.7 v1(9480.7,7208.7) ; v1(9505.08,7488.14) 9480.7,7463.77 v1(9480.7,7208.7) ; v1(9701,6357.4) 9796.1,6357.4 v1(9889.8,6451.1) 10128.4,6212.5 v1(10128.4,6196.9) ; v1(9755.4,6941.5) 9612.4,7084.5 9554.4,7084.5 9480.7,7158.2 v1(9480.7,7208.7) ; v1(9789.8,6628.3) 9801.98,6616.12 SW58.SW2@9801.99,6529.82 ; v1(9903.1,5580) 10013.56,5580 SW60.SW2@10215.39,5781.82 ; v1(9944.1,5447) 9802.1,5305 9802.1,5138 9906.28,5033.82 SW55.SW2@9992.59,5033.82 9921.2,4962.4 9921.2,4695.6 v1(9912.2,4695.6) 9912.2,4613.6 9965.2,4560.6 9965.2,4314 SW56.SW2@9992.59,4286.62 10023.18,4286.62 10059.2,4250.6 10324.2,4250.6 10338.2,4264.6 10463.2,4264.6 v1(10514.2,4315.6) ; v1(10659.3,5440) 10659.3,5348 10709.3,5298 10709.3,5064.3 SW62.SW2@10739.79,5033.82 ; v1(10691.8,4699) 10589.1,4699 10518.8,4628.7 10518.8,4320.2 v1(10514.2,4315.6) ; SW61.SW2@10739.79,4286.62 10710.8,4315.6 v1(10514.2,4315.6) ; v1(10770.9,6078.3) 10796.3,6078.3 v1(10914.3,6196.3) 10914.3,6191 10963.4,6141.9 SW69.SW2@10963.39,5781.82 ; v1(10932.3,6845.4) 11029.5,6942.6 v1(11051.6,6942.6) ; v1(11036.3,2949.8) 11181.88,2804.22 SW66.SW2@11392.79,2804.22 ; v1(11341.2,3217) 11341.2,3209.5 11376.2,3174.5 11376.2,2820.8 SW66.SW2@11392.79,2804.22 ; v1(11364.5,3855.2) 11436.5,3927.2 v1(11436.5,3950.2) 11486.98,4000.68 SW68.SW2@11486.99,4286.52 11445.5,4328 11445.5,4537.2 11397.7,4585 11397.7,4664.5 11431.8,4698.6 v1(11437.1,4698.6) 11486.98,4748.48 SW67.SW2@11486.99,5033.82 ; v1(11597.7,5088.9) 11552.9,5133.7 11507.3,5133.7 11448.8,5192.2 11448.8,5302 11406.8,5344 11406.8,5421 11431.2,5445.4 v1(11437.7,5445.4) 11711.38,5719.08 SW72.SW2@11711.39,5781.82 11551.1,5942.1 11551.1,6137.3 11607.6,6193.8 v1(11662.1,6193.8) ; v1(11798.1,6942.9) 11786.2,6942.9 11770.3,6927 ; v1(11934.4,5601.2) 12036.4,5499.2 12036.4,5392.2 12077.4,5351.2 12133.4,5351.2 12188.4,5406.2 v1(12188.4,5443.2) ; v1(12145.3,4753.2) 12217.3,4681.2 v1(12217.3,4449.2) ; v1(12203.1,7243.2) 12086.5,7243.2 11770.3,6927 ; v1(12285.3,3204.8) 12285.3,3101.4 12312.7,3074 12312.7,2813.6 SW75.SW2@12334.99,2791.32 ; v1(12303.2,6044) 12303.2,6059 12353.2,6109 12353.2,6285.94 SW71.SW2@12597.19,6529.92 12491.98,6529.92 12444.4,6577.5 12444.4,6839.4 v1(12548.1,6943.1) 12548.1,7133.5 v1(12549.8,7135.2) ; v1(12717.2,6035) 12749.2,6067 12878.2,6067 12920.9,6109.7 v1(12920.9,6195.5) 12920.9,6228.5 12953.8,6261.4 13215.1,6261.4 13344.5,6132 13344.5,5921.4 13199.1,5776 12977.1,5776 SW81.SW2@12971.29,5781.82 13210,5543.1 v1(13210,5077) ; v1(12830,3952.8) 12816.3,3952.8 12791.2,3927.7 12791.2,3867.7 12849.9,3809 12849.9,3570.1 SW76.SW2@12880.69,3539.32 12880.68,3195.62 v1(13046.5,3029.8) 13176.5,3159.8 13176.5,3181.8 13198.5,3203.8 v1(13208.5,3203.8) ; 13210.26,6261.4 13345.38,6396.52 SW82.SW2@13345.39,6529.82 13324.3,6550.9 13324.3,6781.4 13247.3,6858.4 13247.3,6924.4 13265.9,6943 v1(13297.9,6943) 13410.7,7055.8 13571.4,7055.8 13620.4,7006.8 13620.4,6905.8 13658,6868.2 13833.1,6868.2 13854.4,6889.5 v1(13854.4,6937.5) ; SW78.SW2@13260.19,2791.32 SW75.SW2@12334.99,2791.32 ; v1(13853.1,7037.5) 13928.5,7112.9 14131.8,7112.9 14342.6,6902.1 v1(14342.6,6851.7) ; H9.3@14341.9,7728.5 14488.99,7581.4 v1(14760.6,7581.4) ; v1(14414.6,6861.1) 14433.4,6861.1 14510.9,6783.6 14510.9,6576.9 SW83.SW2@14556.39,6531.42 14556.38,6288.08 v1(14532.9,6264.6) ; SW84.SW2@14556.39,5783.42 14536.6,5763.64 14536.6,5608.8 14484.7,5556.9 14484.7,5490.3 14509.5,5465.5 v1(14509.5,5446.2) 14510.6,5446.2 14550.9,5405.9 14550.9,5040.9 SW86.SW2@14556.39,5035.42 14413.6,4892.64 14413.6,4780.6 14496.3,4697.9 v1(14512.3,4697.9) 14379,4564.6 14379,4389.9 14481.58,4287.32 SW85.SW2@14556.39,4287.32 14511,4241.94 v1(14511,3949.9) 14556.38,3904.52 SW88.SW2@14556.39,3539.32 ; v1(14857.3,7767.86) 14857.3,7821.6 14883.2,7847.5 14995.7,7847.5 15016.8,7826.4 v1(15016.8,7772.3) ; v1@14891,3204.6 v1(14891,3204.7) ; 14987.68,7847 15163.7,7847 15177.3,7833.4 v1(15177.3,7772.06) ; v1(15253,6229.6) 15253,6479.94 SW94.SW2@15304.49,6531.42 15311.36,6538.3 15631.8,6538.3 15703.8,6610.3 15703.8,6840.3 15712.8,6849.3 15712.8,6956.3 15649.8,7019.3 v1(15617.8,7019.3) ; v1(15255.5,3953.5) 15262.6,3953.5 15285.3,3930.8 15285.3,3558.4 SW89.SW2@15304.39,3539.32 SW88.SW2@14556.39,3539.32 ; v1(15256.4,4698.8) 15250.4,4698.8 15227.4,4721.8 ; SW92.SW2@15304.39,4287.32 15541.92,4287.32 15612.4,4357.8 15612.4,4388.8 15686.4,4462.8 15686.4,4520.8 15626.4,4580.8 15338.4,4580.8 15306.4,4548.8 15306.4,4444.8 15287.4,4425.8 15182.4,4425.8 15137.4,4470.8 15137.4,4631.8 15227.4,4721.8 ; SW93.SW2@15304.49,5783.42 15304.48,5496.28 v1(15255.8,5447.6) 15349,5540.8 15550.4,5540.8 15684.4,5406.8 15684.4,5152.8 15566.92,5035.32 SW91.SW2@15304.39,5035.32 15227.4,4958.34 15227.4,4721.8 ; v1(15770.2,6947.3) 15774.2,6943.3 v1(16007.2,6943.3) ; v1@15827.2,3373.9 v1(15835.2,3373.9) v1(16003.5,3205.6) 16003.5,3160.5 16040.2,3123.8 16040.2,2803.7 SW99.SW2@16052.59,2791.32 15984.9,2859 15345.7,2859 15278.02,2791.32 SW87.SW2@14930.39,2791.32 14785.48,2791.32 14729.6,2847.2 14729.6,3043.3 v1(14891,3204.7) ; v1(15868.8,6783.7) 15868.8,6671.1 15907.6,6632.3 15951.5,6632.3 SW95.SW2@16052.39,6531.42 16134.9,6448.9 16190.7,6448.9 16205.7,6433.9 16205.7,6359.9 16171.7,6325.9 16026.7,6325.9 16006.7,6305.9 v1(16006.7,6196.9) 16013.4,6196.9 16042,6168.3 16042,6108.2 16059.3,6090.9 16305.9,6090.9 16367.3,6152.3 16367.3,6384.2 16388.7,6405.6 16412.8,6405.6 16434,6384.4 16434,6347.8 16544,6237.8 ; v1(16004.5,4696.7) 15981.7,4696.7 15967.1,4682.1 15967.1,4615.4 16035.1,4547.4 16035.1,4304.7 SW97.SW2@16052.39,4287.42 16008.6,4243.64 v1(16008.6,3953.9) 15994.3,3953.9 15975,3934.6 15975,3903.2 16032.9,3845.3 16032.9,3558.8 SW100.SW2@16052.39,3539.32 16078.1,3513.6 16629,3513.6 16692.7,3577.3 v1(16751.9,3577.3) ; 16042,6116.07 16042,5793.9 SW96.SW2@16052.39,5783.52 16052.38,5496.48 v1(16003.8,5447.9) 15997.3,5447.9 15963.3,5413.9 15963.3,5341 16027.6,5276.7 16027.6,5060.3 SW98.SW2@16052.49,5035.42 16126.48,4961.42 SW101.SW2@16700.52,4961.41 ; SW104.SW2@16700.52,6083.41 16546.14,6237.8 16544,6237.8 ; v1(17114.9,6132.2) 17009.3,6237.8 16544,6237.8 ; 8203.8,5216.8 v1(8163.8,5176.8) 8203.8,5216.8 ; SW66.SW2@11392.79,2804.22 11405.68,2791.32 SW75.SW2@12334.99,2791.32 ; 11632.4,6695.5 11667.1,6660.8 ; 11632.4,6695.5 11632.4,6762.1 ; 11632.4,6695.5 11667.1,6660.8 ; 11632.4,6695.5 11632.4,6762.1 ; 11632.4,6695.5 11667.1,6660.8 ; 11632.4,6695.5 11632.4,6762.1 ; 11632.4,6762.1 11704,6833.7 ; 11632.4,6762.1 11704,6833.7 ; 11632.4,6762.1 11704,6833.7 ; 11667.1,6660.8 11718.2,6660.8 ; 11667.1,6660.8 11718.2,6660.8 ; 11667.1,6660.8 11718.2,6660.8 ; 11704,6833.7 11721.1,6833.7 ; 11704,6833.7 11721.1,6833.7 ; 11704,6833.7 11721.1,6833.7 ; 11718.2,6660.8 SW70.SW2@11849.19,6529.82 ; 11718.2,6660.8 SW70.SW2@11849.19,6529.82 ; 11718.2,6660.8 SW70.SW2@11849.19,6529.82 ; 11721.1,6833.7 11770.3,6882.9 ; 11721.1,6833.7 11770.3,6882.9 ; 11770.3,6882.9 11770.3,6927 ; 11770.3,6882.9 11770.3,6927 ; SW88.SW2@14556.39,3539.32 v1(14891,3204.7)
  Bottom Layer w10: v1(2637.4,6593.2) 2701.58,6529.02 SW0.SW2@2735.99,6529.02 2621.3,6414.34 2621.3,6225.4 2652.05,6194.65 v1(2686.78,6194.65) SW1.GND@2722.45,6194.61 ; v1(2666.7,7546.4) 2722.57,7546.4 2732.37,7536.6 ; v1(2668.7,7434.3) 2668.7,7398.2 2681.1,7385.8 2735.3,7385.8 ; v1(2689.3,6078.7) 2734.78,6033.22 SW1.SW2@2734.79,5781.12 2899.91,5615.99 2899.91,5447.35 2898.66,5446.1 2808.8,5446.1 2776.8,5414.1 2776.8,5331.1 2810.8,5297.1 2866.8,5297.1 2912.28,5251.62 SW2.SW2@2912.29,5033.82 2988.51,4957.59 SW3.GND@2988.51,4700.55 ; v1@2796.8,3768.1 v1(2792.8,3768.1) 2764.8,3796.1 2764.8,3900.1 2765.8,3901.1 2817.25,3952.55 2988.41,3952.55 2988.41,4274.55 SW3.SW2@3000.89,4287.02 2910.9,4287 2810.8,4387.1 2810.8,4669.1 2842.8,4701.1 SW3.GND@2988.5,4700.6 ; SW5.GND@2811.45,3204.81 2811.41,3349.65 SW4.SW2@3000.79,3539.02 ; 2874.6,7683.3 2872.8,7681.5 2635.6,7681.5 2619.6,7697.5 2619.6,7731 2667.1,7778.5 2667.1,7796.5 2735.1,7864.5 3307.6,7864.5 3407.1,7765 3407.1,7553.5 v1(3396.58,7542.98) 3389.62,7536.02 U1.23@3344.73,7536.02 ; U1.6@3344.73,7201.38 3413.48,7201.38 v1(3457.1,7245) 3402.3,7299.8 U1.11@3344.73,7299.8 ; C1.2@3538.07,7794.8 3497.2,7753.93 3497.2,7708.1 3497.1,7573.9 3534,7537 v1(3552.6,7537) ; C2.2@3539.97,6863.3 3543.17,6866.5 3664,6866.5 3709,6911.5 3709,6947.5 3668.5,6988 3520.5,6988 3509.5,6999 3509.5,7155.8 3555.8,7202.1 v1(3566.4,7202.1) U1.51@3636.07,7201.38 ; U1.39@3636.07,7437.6 3577.8,7437.6 3564.4,7451 3564.4,7525.2 v1(3552.6,7537) ; U1.34@3636.07,7536.02 v1(3552.6,7537) ; v1(3702.8,3206.1) 4014.68,3517.98 SW6.SW2@4014.69,3539.32 ; v1(3817.8,3763.1) 3760.8,3820.1 3760.8,3941.1 3772.55,3952.85 SW6.GND@4002.34,3952.81 4014.48,3965.02 SW9.SW2@4014.49,4286.62 4264.4,4286.6 4320.9,4343.1 4320.9,4415.9 4294.3,4442.5 4271.7,4442.5 4212.5,4501.7 4212.5,4546.9 4173.2,4586.2 3862.5,4586.2 3837.3,4611.4 3837.3,4664.3 3873.2,4700.2 SW9.GND@4002.1,4700.2 ; v1(3828.7,6429) 3827.17,6427.47 v1(3688.07,6427.47) ; v1(3885.9,6625.3) v1(3688.07,6427.47) ; v1(3904.7,6401.2) 3904.7,6108.5 SW22.SW2@4231.29,5781.92 ; SW9.GND@4002.11,4700.15 4014.68,4712.72 SW8.SW2@4014.69,5033.62 4041.56,5060.5 4287.9,5060.5 4287.9,5068.5 4331.9,5112.5 4328.9,5115.5 4328.9,5165.5 4313.9,5180.5 4295.38,5180.5 4283.38,5192.5 4264.9,5192.5 4216.9,5240.5 4216.9,5274.5 4156.9,5334.5 3975.9,5334.5 3973.9,5336.5 3856.9,5336.5 3813.9,5379.5 3813.9,5402.5 3858.55,5447.15 4002.31,5447.15 3667.64,5781.82 SW10.SW2@3483.09,5781.82 3484.76,5783.5 3779.9,5783.5 3821.9,5825.5 3821.9,5912.5 3807.9,5926.5 3766.91,5926.5 3681.9,6011.51 3681.9,6031.5 3633.9,6079.5 3402.9,6079.5 3361.9,6038.5 3223.9,6038.5 3180.9,6081.5 3180.9,6117.5 3258.75,6195.35 3470.71,6195.35 3470.71,6210.11 v1(3688.07,6427.47) ; SW23.SW2@4014.69,6529.72 4014.68,6399.68 SW22.GND@4218.94,6195.41 ; v1(4483.2,6940.7) 4483.2,6782.7 v1(4554.2,6711.7) ; v1(4539.9,5529) 4621.55,5447.35 SW20.GND@4749.51,5447.35 ; v1(4574.4,3203.7) 4579.9,3209.2 4626.2,3209.2 4598.5,3236.9 4598.5,3479.6 4658.22,3539.32 SW18.SW2@4761.89,3539.32 ; SW18.GND@4749.55,3952.81 4669.85,3952.85 v1(4661.4,3944.4) 4761.88,4044.88 SW21.SW2@4761.89,4286.52 ; SW21.GND@4749.55,4700.01 4670.75,4700.05 v1(4667,4696.3) 4655.9,4685.2 4522.5,4685.2 4487.4,4720.3 4487.4,4822.2 4699.02,5033.82 SW20.SW2@4761.89,5033.82 ; v1(4774.5,5734.8) 4821.52,5781.82 SW13.SW2@4979.19,5781.82 ; v1(4881.9,6192.2) 4885.05,6195.35 SW13.GND@4966.81,6195.35 ; v1(5403,5445) 5405.35,5447.35 SW15.GND@5496.71,5447.35 ; v1(5416,3952) SW17.GND@5496.7,3952.9 ; v1(5422,4699) 5423.05,4700.05 SW14.GND@5496.74,4700.01 ; v1(5430,4812) 5509.08,4891.08 SW15.SW2@5509.09,5033.82 ; SW11.SW2@5510.69,6529.82 5393.7,6412.84 5393.7,6159.4 ; v1(5558.3,5755.1) 5585.12,5781.92 SW24.SW2@5727.29,5781.92 5393.7,6115.5 5393.7,6159.4 ; SW24.GND@5714.94,6195.41 5531.15,6195.45 5508.4,6172.7 5407,6172.7 5393.7,6159.4 ; v1(6149.8,5636.4) 6083.9,5570.5 6083.9,5507.3 6143.85,5447.35 v1(6206.86,5447.35) SW26.GND@6244.01,5447.35 ; SW25.GND@6244.05,4700.01 v1(6206.86,4700.05) 6031.25,4700.05 6013.5,4717.8 6013.5,4790.94 SW26.SW2@6256.39,5033.82 ; SW25.SW2@6256.39,4286.52 6243.91,4274.05 SW28.GND@6243.94,3952.81 6212.36,3984.4 5996.2,3984.4 5941.5,3929.7 5941.5,3884.4 6256.28,3569.62 SW28.SW2@6256.29,3539.32 SW29.SW2@7003.59,3539.32 SW40.SW2@7750.69,3539.32 8245.7,3044.3 8245.7,2846.1 8300.48,2791.32 SW42.SW2@8504.59,2791.32 ; SW33.GND@6462.91,6195.35 6462.91,6288.61 v1(6636.4,6462.1) ; v1(6805.3,5529.3) 6805.3,5515.3 v1(6874.1,5446.5) SW31.GND@6991.2,5447.3 ; v1(6836.1,5665.9) 6951.92,5781.72 SW36.SW2@7222.99,5781.72 7198.1,5806.6 7198.1,6022.9 7128.1,6092.9 7088.1,6092.9 7063.1,6117.9 7063.1,6167.9 7090.45,6195.25 v1(7175.12,6195.25) SW36.GND@7210.65,6195.21 ; v1(7479.1,6363.9) 7558.28,6443.08 SW35.SW2@7558.29,6529.62 ; v1(7660.2,5446.3) 7661.25,5447.35 SW38.GND@7738.41,5447.35 ; v1(7699.7,4697.4) 7487.9,4696.7 7444.9,4653.7 7444.9,4609.7 7750.7,4303.9 SW37.SW2@7750.69,4286.62 7719.8,4255.7 7569.9,4255.7 7466.9,4152.7 7466.9,3974.7 7488.8,3952.9 v1(7699.08,3952.9) SW40.GND@7738.3,3952.9 ; v1(8026.4,6588.5) 8247.4,6588.5 SW46.SW2@8305.99,6529.92 ; v1(8163.8,5176.8) 8163.8,5154.8 8242.8,5075.8 8356.8,5075.8 v1(8380.8,5051.8) ; v1(8203.8,5280.8) 8250.8,5327.8 v1(8385.8,5327.8) ; v1(8254.3,6942.7) 8282.4,6970.8 8282.4,7245.3 8321.4,7284.3 v1(8353.4,7284.3) ; v1(8416.9,3945.8) 8423.95,3952.85 SW41.GND@8485.65,3952.81 8485.61,4087.91 v1(8560.9,4163.2) ; v1(8454.2,4700.5) 8498.08,4744.38 SW43.SW2@8498.09,5033.82 ; SW43.GND@8485.71,5447.35 8393.35,5447.35 v1(8388.8,5442.8) 8719.38,5773.38 SW48.SW2@8719.39,5781.82 8690.8,5810.4 v1(8690.8,6033.8) ; SW42.GND@8492.25,3204.81 8409.85,3204.85 v1(8408.5,3206.2) 8497.98,3295.68 SW41.SW2@8497.99,3539.32 ; v1(8816.1,7090.5) 8816.1,7159.5 8966.5,7309.9 U10.11@9306.73,7309.9 9341.7,7309.2 9375,7275.9 v1(9375,7210.9) 9307.31,7210.9 U10.6@9306.73,7211.48 ; v1@8997.1,4084.6 v1(8998.5,4084.6) 9078.5,4164.6 9123.36,4164.6 SW49.SW2@9245.29,4286.52 9250.06,4291.3 9530.5,4291.3 9625.1,4385.9 9625.1,4502 9541.1,4586 9135.7,4586 9061.1,4660.6 9061.1,4748.6 9153.1,4840.6 9153.1,4920.65 ; SW47.GND@9041.61,6943.35 8955.95,6943.35 8921.1,6908.5 8921.1,6851.5 8948.1,6824.5 9208.1,6824.5 9250.1,6782.5 9250.1,6668.5 9111.4,6529.8 SW47.SW2@9053.99,6529.82 ; v1(9109.1,5448.9) 9110.65,5447.35 SW50.GND@9232.91,5447.35 ; v1(9163.8,3951.3) 9165.35,3952.85 SW52.GND@9232.94,3952.81 ; v1(9185.1,5552.9) 9193.1,5552.9 v1(9256.1,5615.9) ; SW49.GND@9232.94,4700.01 9184.35,4700.05 9153.1,4731.3 9153.1,4941.64 SW50.SW2@9245.29,5033.82 ; U10.23@9306.73,7546.12 v1(9496.4,7546.12) U10.34@9598.07,7546.12 ; 9447.1,7546.12 v1(9505.08,7488.14) 9545.52,7447.7 U10.39@9598.07,7447.7 ; SW57.GND@9455.01,6195.35 9455.01,6224.41 9580,6349.4 9588,6357.4 v1(9701,6357.4) ; v1(9480.7,7208.7) 9595.29,7208.7 U10.51@9598.07,7211.48 ; SW58.GND@9789.61,6943.35 9714.75,6943.35 9592.7,6821.3 9591.4,6820 9591.4,6730.6 9693.7,6628.3 v1(9789.8,6628.3) ; SW58.SW2@9801.99,6529.82 9811.08,6529.82 v1(9889.8,6451.1) 9890.7,6450.2 v1@9892.9,6450.2 ; v1(9903.1,5580) 9903.1,5524.46 SW55.GND@9980.21,5447.35 ; v1(9903.9,3952) SW53.GND@9980.2,3952.9 ; v1(9912.2,4695.6) 9916.75,4700.15 SW56.GND@9980.21,4700.15 ; v1(10128.4,6196.9) 10129.95,6195.35 SW60.GND@10203.01,6195.35 ; v1(10514.2,4315.6) 10514.2,4105.5 v1(10671.8,3947.9) 10676.75,3952.85 SW64.GND@10727.44,3952.81 ; v1(10691.8,4699) 10691.8,4985.84 SW62.SW2@10739.79,5033.82 ; SW62.GND@10727.41,5447.35 10666.65,5447.35 v1(10659.3,5440) 10663.3,5444 10663.3,5667 10778.12,5781.82 SW69.SW2@10963.39,5781.82 ; SW64.SW2@10739.79,3539.32 11036.3,3242.8 v1(11036.3,2949.8) ; v1(10770.9,6078.3) 10778.7,6086.1 10778.7,6290.4 11018.12,6529.82 SW59.SW2@11101.19,6529.82 10932.3,6698.7 v1(10932.3,6845.4) ; v1(11341.2,3217) 11486.98,3362.78 SW65.SW2@11486.99,3539.32 11456.5,3569.8 11456.5,3786.2 11387.5,3855.2 v1(11364.5,3855.2) ; SW67.SW2@11486.99,5033.82 11542.06,5088.9 v1(11597.7,5088.9) ; v1(11662.1,6193.8) 11849.18,6380.88 SW70.SW2@11849.19,6529.82 ; SW72.SW2@11711.39,5781.82 11892,5601.2 v1(11934.4,5601.2) ; v1(12188.4,5443.2) 12172.9,5443.2 12159.3,5456.8 12058,5456.8 12038,5436.8 12038,5383.5 12071.3,5350.2 12131.2,5350.2 12220.6,5260.8 12220.6,5047.4 SW74.SW2@12234.19,5033.82 12145.3,4944.94 v1(12145.3,4753.2) 12198.45,4700.05 SW73.GND@12221.94,4700.01 ; v1(12203.1,7243.2) 12441.8,7243.2 v1(12549.8,7135.2) ; v1(12217.3,4449.2) 12234.28,4432.22 SW73.SW2@12234.29,4286.52 ; v1(12303.2,6044) 12312.2,6035 v1(12717.2,6035) ; SW81.SW2@12971.29,5781.82 12886.82,5781.82 12694.2,5589.2 12694.2,4779.6 12784.5,4689.3 13234.6,4689.3 SW80.SW2@13256.69,4667.22 ; v1(13046.5,3029.8) 13046.5,3005 SW78.SW2@13260.19,2791.32 ; v1(13853.1,7037.5) 13853.1,6938.8 v1(13854.4,6937.5) ; v1(14342.6,6851.7) 14351.8,6860.9 14443.8,6860.9 14470.3,6887.4 14470.3,6936.4 14478.85,6944.95 SW83.GND@14544.01,6944.95 ; v1(14532.9,6264.6) 14532.9,6208.06 14544.01,6196.95 14510.75,6196.95 14447.1,6133.3 14447.1,6109.2 14536.4,6019.9 14536.4,5803.4 SW84.SW2@14556.39,5783.42 ; SW83.GND@14544,6945 14554.3,6955.2 14554.3,6981.3 14562.3,6990.2 15111.4,6990.2 15126.4,7005.2 15126.4,7139.5 15055.7,7210.2 15019.2,7210.2 ; v1(14760.6,7581.4) 14797.18,7544.82 U23.23@14893.03,7544.82 U23.34@15184.37,7544.82 15120.68,7544.82 15077.3,7588.2 15077.3,7672.06 v1(15177.3,7772.06) 15177.3,7752.5 15226.6,7703.2 15322.23,7703.2 C5.2@15331.7,7693.73 ; U23.11@14893.03,7308.6 14978.1,7308.6 15045.1,7375.6 15045.1,7469.93 15085.02,7509.86 ; 14936.2,7210.18 14989.63,7156.75 C6.2@14989.63,7053.8 ; 15045.1,7395.61 15045.1,7299.2 14956.08,7210.18 U23.6@14893.03,7210.18 U23.51@15184.37,7210.18 ; 15050.06,7544.82 15148.48,7446.4 U23.39@15184.37,7446.4 ; 15126.4,7074.45 15126.4,7038.7 15143.5,7021.6 15215.46,7021.6 ; SW93.GND@15292.11,6196.95 15286.65,6196.95 15199.7,6283.9 15155,6283.9 15140.4,6269.3 15140.4,6158.6 15191.1,6107.9 15211.1,6107.9 15271.1,6047.9 15271.1,5816.8 SW93.SW2@15304.49,5783.42 ; SW94.GND@15292.11,6944.95 15215.46,7021.6 ; v1(15770.2,6947.3) 15695.9,7021.6 15215.46,7021.6 ; 15845.2,3380.9 16003.62,3539.32 SW100.SW2@16052.39,3539.32 ; v1(15868.8,6783.7) 15887.8,6802.7 15887.8,6908.5 15922.6,6943.3 v1(16007.2,6943.3) ; v1(16555.3,3512.7) 16555.3,3299 16624.2,3230.1 16735.7,3230.1 SW102.SW2@16800.49,3165.32 ; SW101.SW2@16700.52,4961.41 16887.82,4961.42 16990.4,5064 17090.4,5064 17112.6,5041.8 17112.6,4975.24 SW101.GND@17114.01,4973.76
  Bottom Layer w39.37: H1.6@6510.8,7826.8 6680.69,7826.81 pad.13@6693.44,7839.56
  other v1: 2687.4,6943.2
pads on no net: SW0. SW1. SW2. SW3. SW4. SW5. SW6. SW7. SW8. SW9. SW10. SW11. SW12. SW13. SW14. SW15. SW16. SW17. SW18. SW19. SW20. SW21. SW22. SW23. SW24. SW25. SW26. SW28. SW29. SW31. SW32. SW33. SW34. SW35. SW36. SW37. SW38. SW40. SW41. SW42. SW43. SW44. SW45. SW46. SW47. SW48. SW49. SW50. SW52. SW53. SW55. SW56. SW57. SW58. SW59. SW60. SW61. SW62. SW64. SW65. SW66. SW67. SW68. SW69. SW70. SW71. SW72. SW73. SW74. SW75. SW76. SW78. SW80. SW81. SW82. SW83. SW84. SW85. SW86. SW87. SW88. SW89. SW91. SW92. SW93. SW94. SW95. SW96. SW97. SW98. SW99. SW100. SW101. SW102. SW104.

## Polygon pours and split planes (outlines as drawn)
VSS_PCA on Top Layer (solid): 2075.8,8377.3 2187,8266.1 17686.9,8266.1 17575.8,8155 17575.8,2192.1 1946.2,2192.1
VSS_PCA on Bottom Layer (solid): 1869.7,9074.1 1943.8,9148.2 17851.2,9148.2 18277.1,8722.3 18277.1,1592.6 18184.5,1500 1629,1500